# Altium PCB fun_generator.PcbDoc
Units mm, origin at the board's own origin, x right, y up, seen from the top; angles counter-clockwise.
Board outline 152.4 x 101.6 mm, 2 copper layers (Top Layer, Bottom Layer); 8 components, 0 nets, 28 pads, 0 vias.
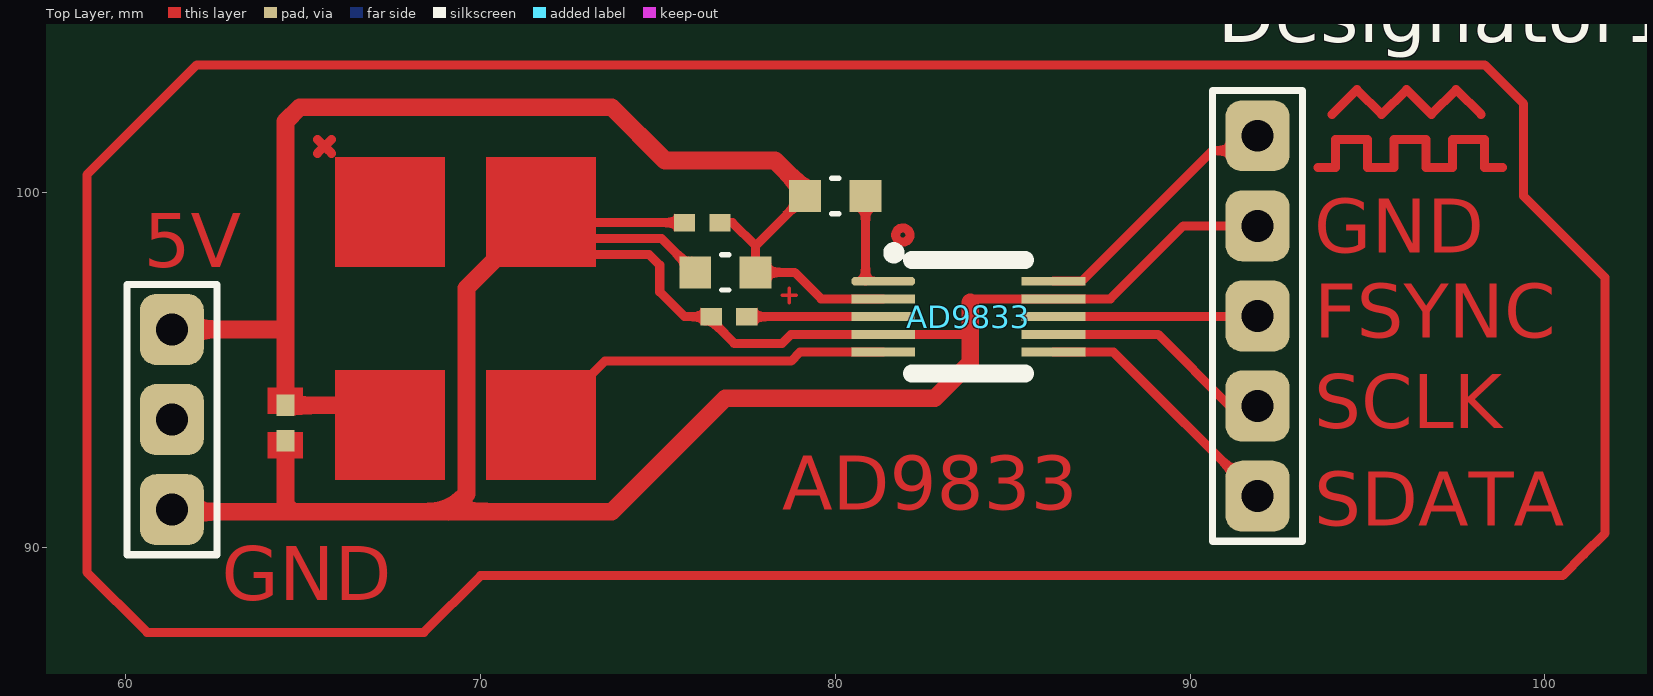
[diagram p0: Top Layer view]
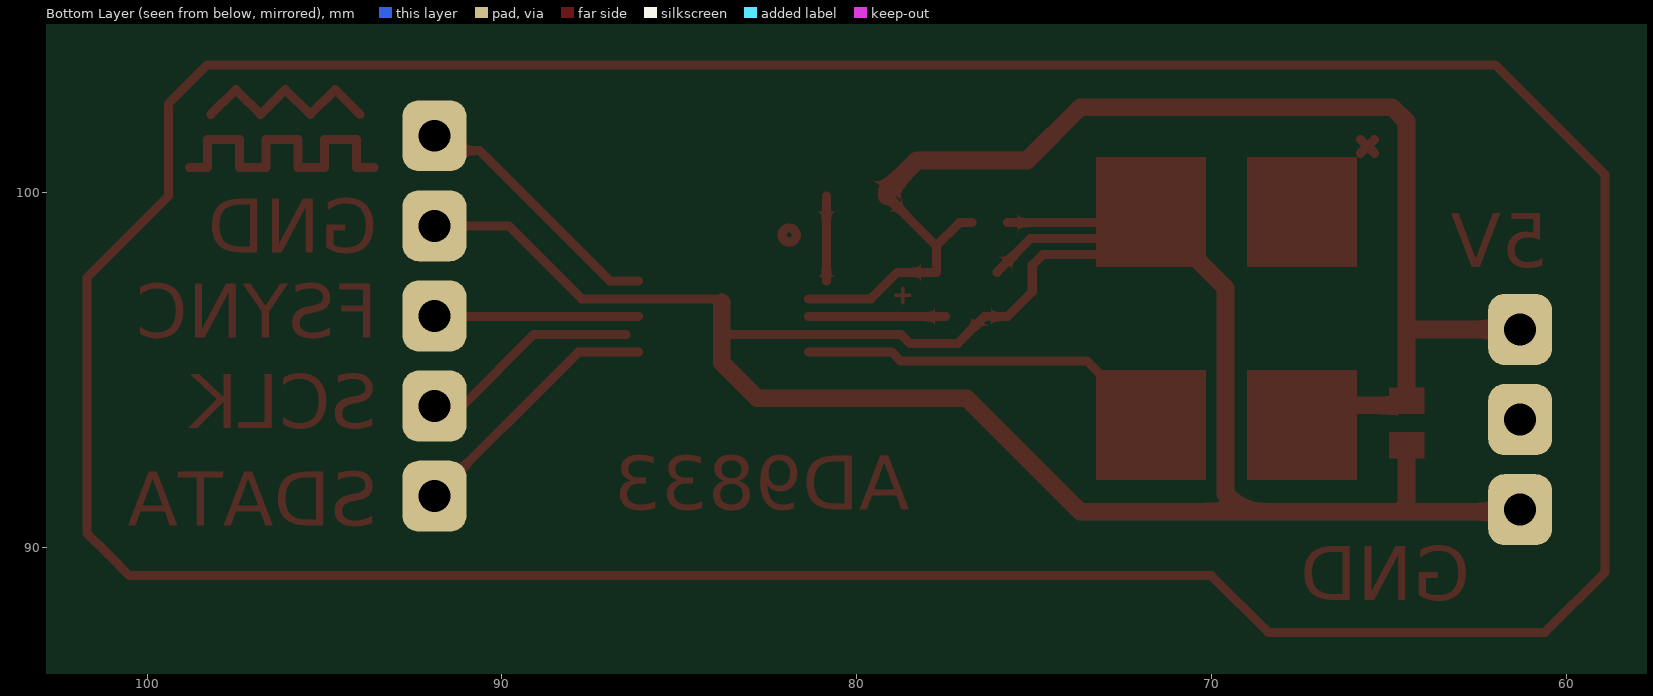
[diagram p1: Bottom Layer view, seen from below]

## Layer stack, top to bottom
Top Solder: solder mask 0.0102, Solder Resist, Dk 3.5
Top Layer: signal copper 0.0356
Dielectric 1: dielectric 0.32, FR-4, Dk 4.8
Bottom Layer: signal copper 0.0356
Bottom Solder: solder mask 0.0102, Solder Resist, Dk 3.5

## Board outline
25.4,25.4 177.8,25.4 177.8,127 25.4,127

## Design rules (kind name [scope] priority, off if disabled: settings)
Clearance [All] p1: gap=0.254 ignorepadtopadclearanceinfootprint=FALSE except(0: Arc-Hole Track-Hole SMDPad-Hole THPad-Hole Via-Hole Fill-Hole Poly-Hole Region-Hole Text-Hole)
PolygonConnect [All] p1: connectstyle=Relief reliefconductorwidth=0.254 reliefentries=4 polygonreliefangle="90 Angle" airgapwidth=0.254
RoutingVias [All] p1: holewidth=0.711 width=1.27 viastyle="Through Hole" minholewidth=0.711 minwidth=1.27 maxholewidth=0.711 maxwidth=1.27
SolderMaskExpansion [All] p1: expansion=0.102
Width [All] p1: maxlimit=0.254 minlimit=0.254 preferedwidth=0.254
30 further rules are at their usual default settings.

## Components (designator, comment, footprint, x,y, rotation, side; value= is the part's Value field where it differs from the comment)
AD9833 "Comment" MSOP-10_M 83.75,96.5 r270 top
Designator11 "Comment" HDR1X5 91.9,101.6 r270 top
? "Comment" HDR1X3 61.3,96.14 r270 top
? "Comment" 1608[0603]_M 76.9,97.75 r180 top
? "Comment" 1608[0603]_M 80,99.899 r0 top
? "Comment" 0402 77,96.5 r0 top
? "Comment" 0402 76.25,99.15 r0 top
? "Comment" 0402 64.5,93.5 r270 top

## Footprints (in the part's own frame and the unit in brackets; to place one, negate y for a bottom-side part, rotate by r counter-clockwise, add the part's x,y. Pads: shape width x height; smd on the part's side, far side on the other; paste and mask are expansions set on the pad)
0402 [mm] "Chip Capacitor, Body 1.0x0.5mm, IPC High Density"
  rect 0.6x0.5 smd: 1(-0.5,0) 2(0.5,0)
  body extent -0.55,-0.3 0.55,0.3, height 1.3
1608[0603]_M [mm] "Two Terminal Package, Body 1.6x0.8mm, IPC Low Density"
  rect 0.9x0.9 smd: 1(-0.85,0) 2(0.85,0)
  silkscreen extent -0.1,-0.5 0.1,0.5, body extent -0.8,-0.4 0.8,0.4, height 0.85
HDR1X3 [mm] "Connector; Header; 3 Position"
  rrect50% 2x1.8 hole 0.9: 2(2.54,0) 5V(0,0) GND(5.08,0)
  silkscreen extent -1.27,-1.27 6.35,1.27
HDR1X5 [mm] "Connector; Header; 5 Position"
  rrect50% 2x1.8 hole 0.9: 1(0,0) 2(2.54,0) 3(5.08,0) 4(7.62,0) 5(10.16,0)
  silkscreen extent -1.27,-1.27 11.43,1.27
MSOP-10_M [mm] "MSOP, 10-Leads, Body 3x3x1.1mm, Pitch 0.5mm, Lead Span 4.9mm, IPC Low Density"
  oct 0.25x1.8 smd paste-0.025 mask+0.075: 1(-1,-2.4)
  rect 0.25x1.8 smd paste-0.025 mask+0.075: 2(-0.5,-2.4) 3(0,-2.4) 4(0.5,-2.4) 5(1,-2.4) 6(1,2.4) 7(0.5,2.4) 8(0,2.4) 9(-0.5,2.4) 10(-1,2.4)
  silkscreen extent -1.95,-2.25 1.6,1.6, body extent -1.5,-1.5 1.5,1.5, height 1.1

## Nets (pads, with @x,y where several pads share a name; then routed paths per layer and width w, separated by ;. In a path a pad name is that pad's centre, name@x,y a point inside that pad or via, vN(x,y) a via of type N, cw(c..) or ccw(c..) an arc to the next point about the centre after c; other vN are vias at no path point)
pads on no net: ?.1 ?.2 ?.5V ?.GND AD9833.1 AD9833.2 AD9833.3 AD9833.4 AD9833.5 AD9833.6 AD9833.7 AD9833.8 AD9833.9 AD9833.10 Designator11.1 Designator11.2 Designator11.3 Designator11.4 Designator11.5
copper on no net: | length 280.2
  Top Layer w0.1: 78.5,97.1 78.9,97.1 ; 78.7,96.9 78.7,97.3
  Top Layer w0.254: 64.39,96.14 64.5,96.25 ; 65.4,101.1 65.8,101.5 ; 65.4,101.5 65.5,101.4 65.7,101.2 65.8,101.1 ; 69.6,97.3 71.7,99.4 ; 71.75,93.5 73.5,95.25 78.75,95.25 79,95.5 81.35,95.5 ; 72.6,99.15 75.75,99.15 ; 72.75,98.25 74.75,98.25 75.05,97.95 75.05,97.2 75.75,96.5 76.4,96.5 77.15,95.75 78.5,95.75 78.75,96 81.35,96 83.75,96 ; 72.8,98.7 75.1,98.7 76.05,97.75 ; 76.75,99.15 77.1,99.15 77.75,98.5 ; 77.5,96.5 81.35,96.5 ; 77.75,98.15 77.75,97.75 ; 79.149,99.899 77.75,98.5 ; 80.85,97.5 80.85,98.4 80.85,99.899 ; 81.35,97 79.6,97 78.85,97.75 77.75,97.75 ; 83.8,97 86.15,97 87.75,97 89.81,99.06 91.9,99.06 ; 86.15,95.5 87.7,95.5 ; 86.15,96.5 87.7,96.5 91.88,96.5 91.9,96.52 ; 86.15,97.5 86.95,97.5 90.63,101.18 91.2,101.18 ; 86.5,96 89.1,96 91.12,93.98 91.9,93.98 ; 86.8,95.5 87.65,95.5 ; 86.9,95.5 87.84,95.5 91.9,91.44 ; 89.1,89.2 100.5,89.2 101.1,89.8 101.7,90.4 101.7,97.599 99.4,99.899 99.4,102.5 98.3,103.6 62,103.6 58.9,100.5 58.9,97.6 58.9,89.3 60.6,87.6 68.4,87.6 70,89.2 89.8,89.2 ; 93.6,100.7 94.1,100.7 94.1,101.5 95,101.5 95,100.7 95.5,100.7 ; 94,102.2 94.7,102.9 95.4,102.2 96.1,102.9 96.8,102.2 97.5,102.9 98.2,102.2 ; 95.25,100.7 95.75,100.7 95.75,101.5 96.65,101.5 96.65,100.7 97.15,100.7 ; 96.9,100.7 97.4,100.7 97.4,101.5 98.3,101.5 98.3,100.7 98.8,100.7 ; 77.75,97.75 77.75,98.5 ; 82.1,98.8 ccw(c81.9,98.8) 82.1,98.8
  Top Layer w0.5: 61.3,91.06 61.36,91 64.7,91 ; 61.3,96.14 64.39,96.14 ; 64.5,92.6 64.5,91.2 64.7,91 ; 64.5,94 66.75,94 ; 64.5,94.2 64.5,96.25 64.5,102 64.9,102.4 73.7,102.4 75.2,100.9 78.299,100.9 79.149,100.05 79.149,99.899 ; 70.6,98.3 69.6,97.3 69.6,91.5 69.1,91 ; 83.8,96.9 83.8,95.2 82.8,94.2 76.9,94.2 73.7,91 69.1,91 ; 64.7,91 69.1,91

## Other copper
Top Layer:
  rectangle: 64,92.5 65,93.25
  rectangle: 64,93.75 65,94.5
  region: 73.25,91.9 73.25,95 70.15,95 70.15,91.9
  region: 73.25,97.9 73.25,101 70.15,101 70.15,97.9
  region: 69,97.9 69,101 65.9,101 65.9,97.9
  region: 69,91.9 69,95 65.9,95 65.9,91.9
  text "GND" at 93.5,98.3 h1.52
  text "5V" at 60.5,97.9 h1.52
  text "FSYNC" at 93.5,95.9 h1.52
  text "SCLK" at 93.5,93.35 h1.52
  text "SDATA" at 93.5,90.6 h1.52
  text "GND" at 62.7,88.5 h1.52